# EAGLE board fermentasi (EAGLE 7.1.0)
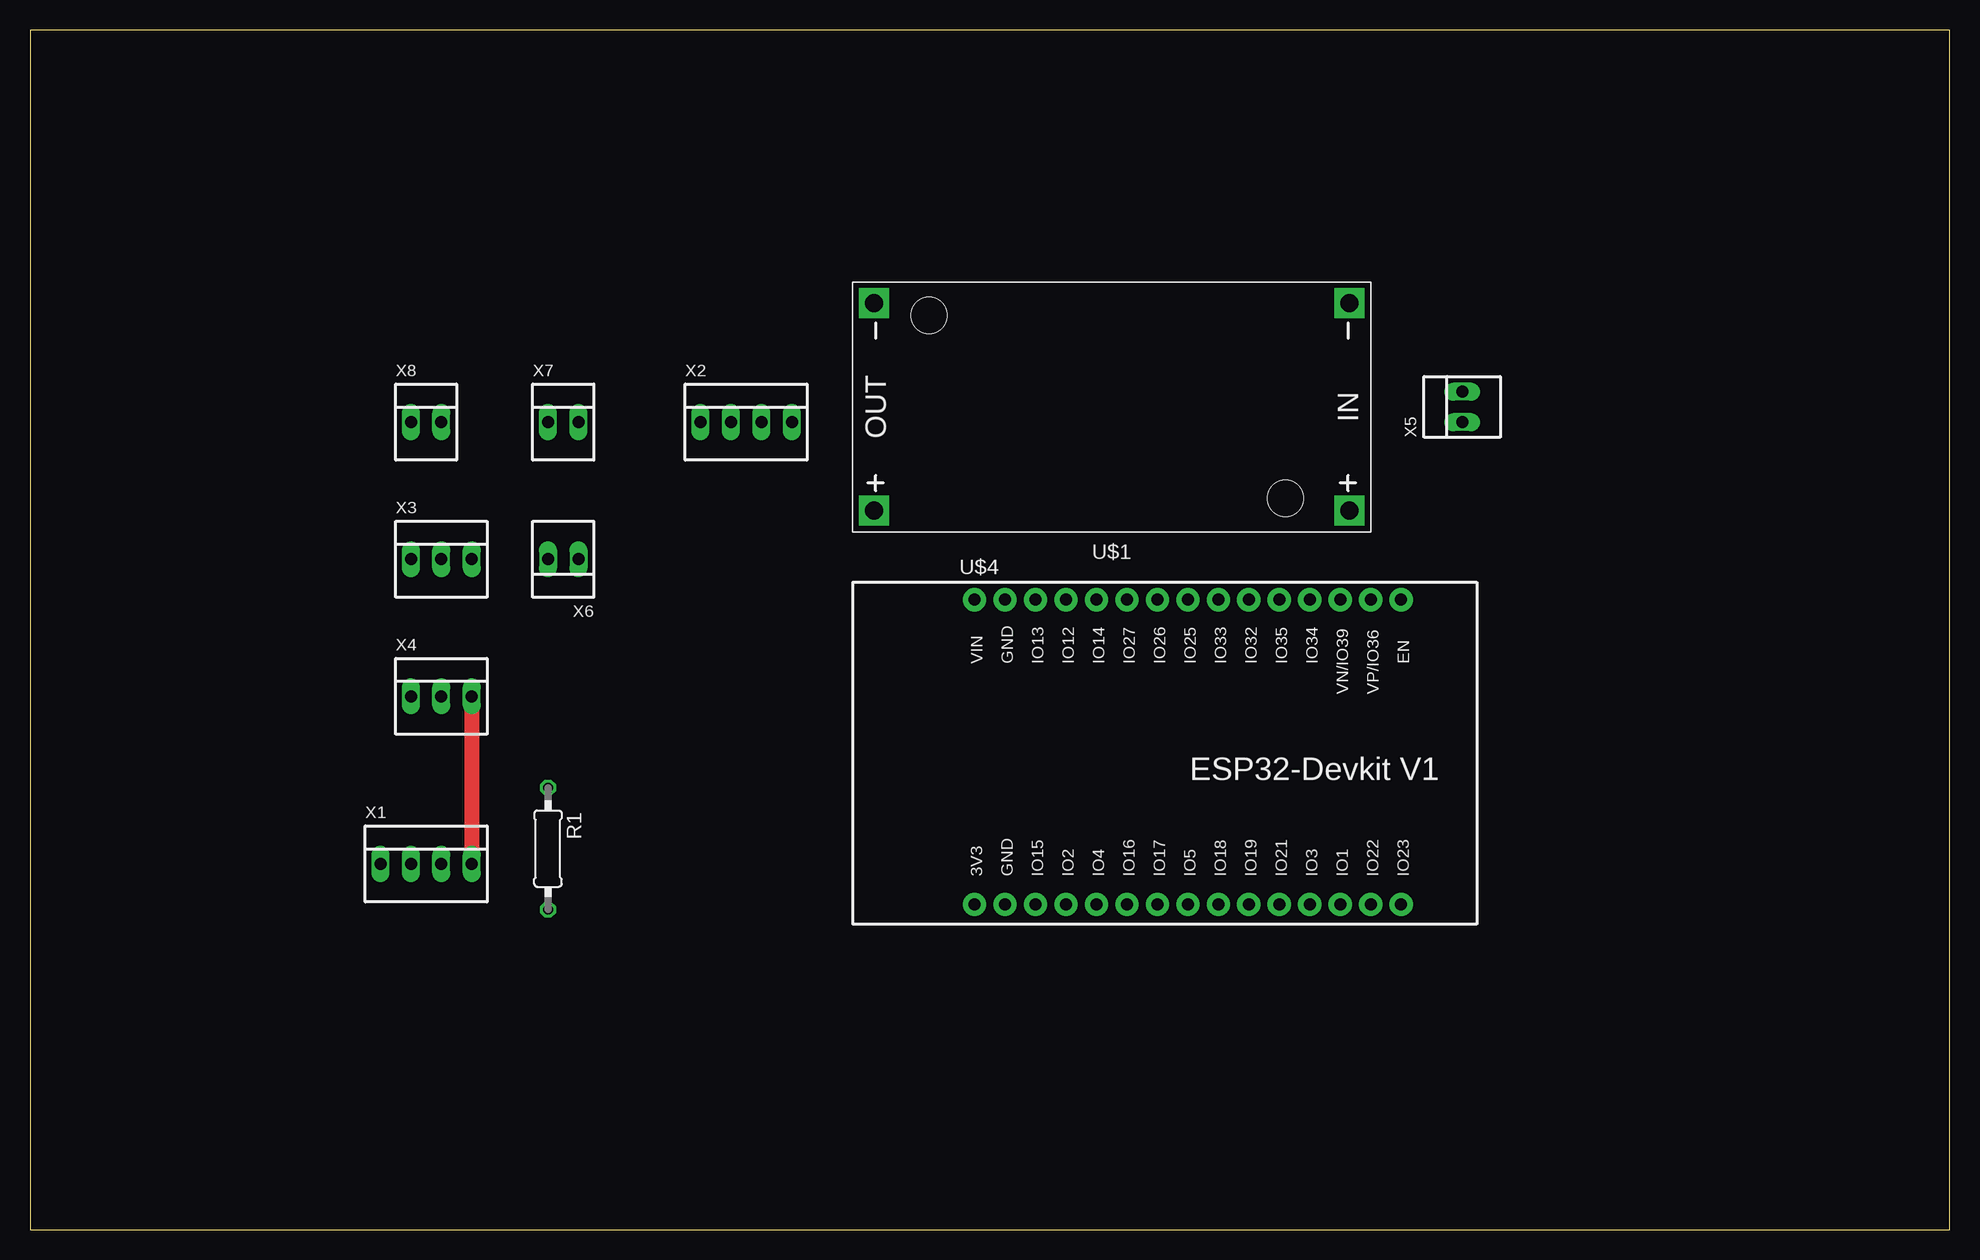
[diagram p0: board, top side]
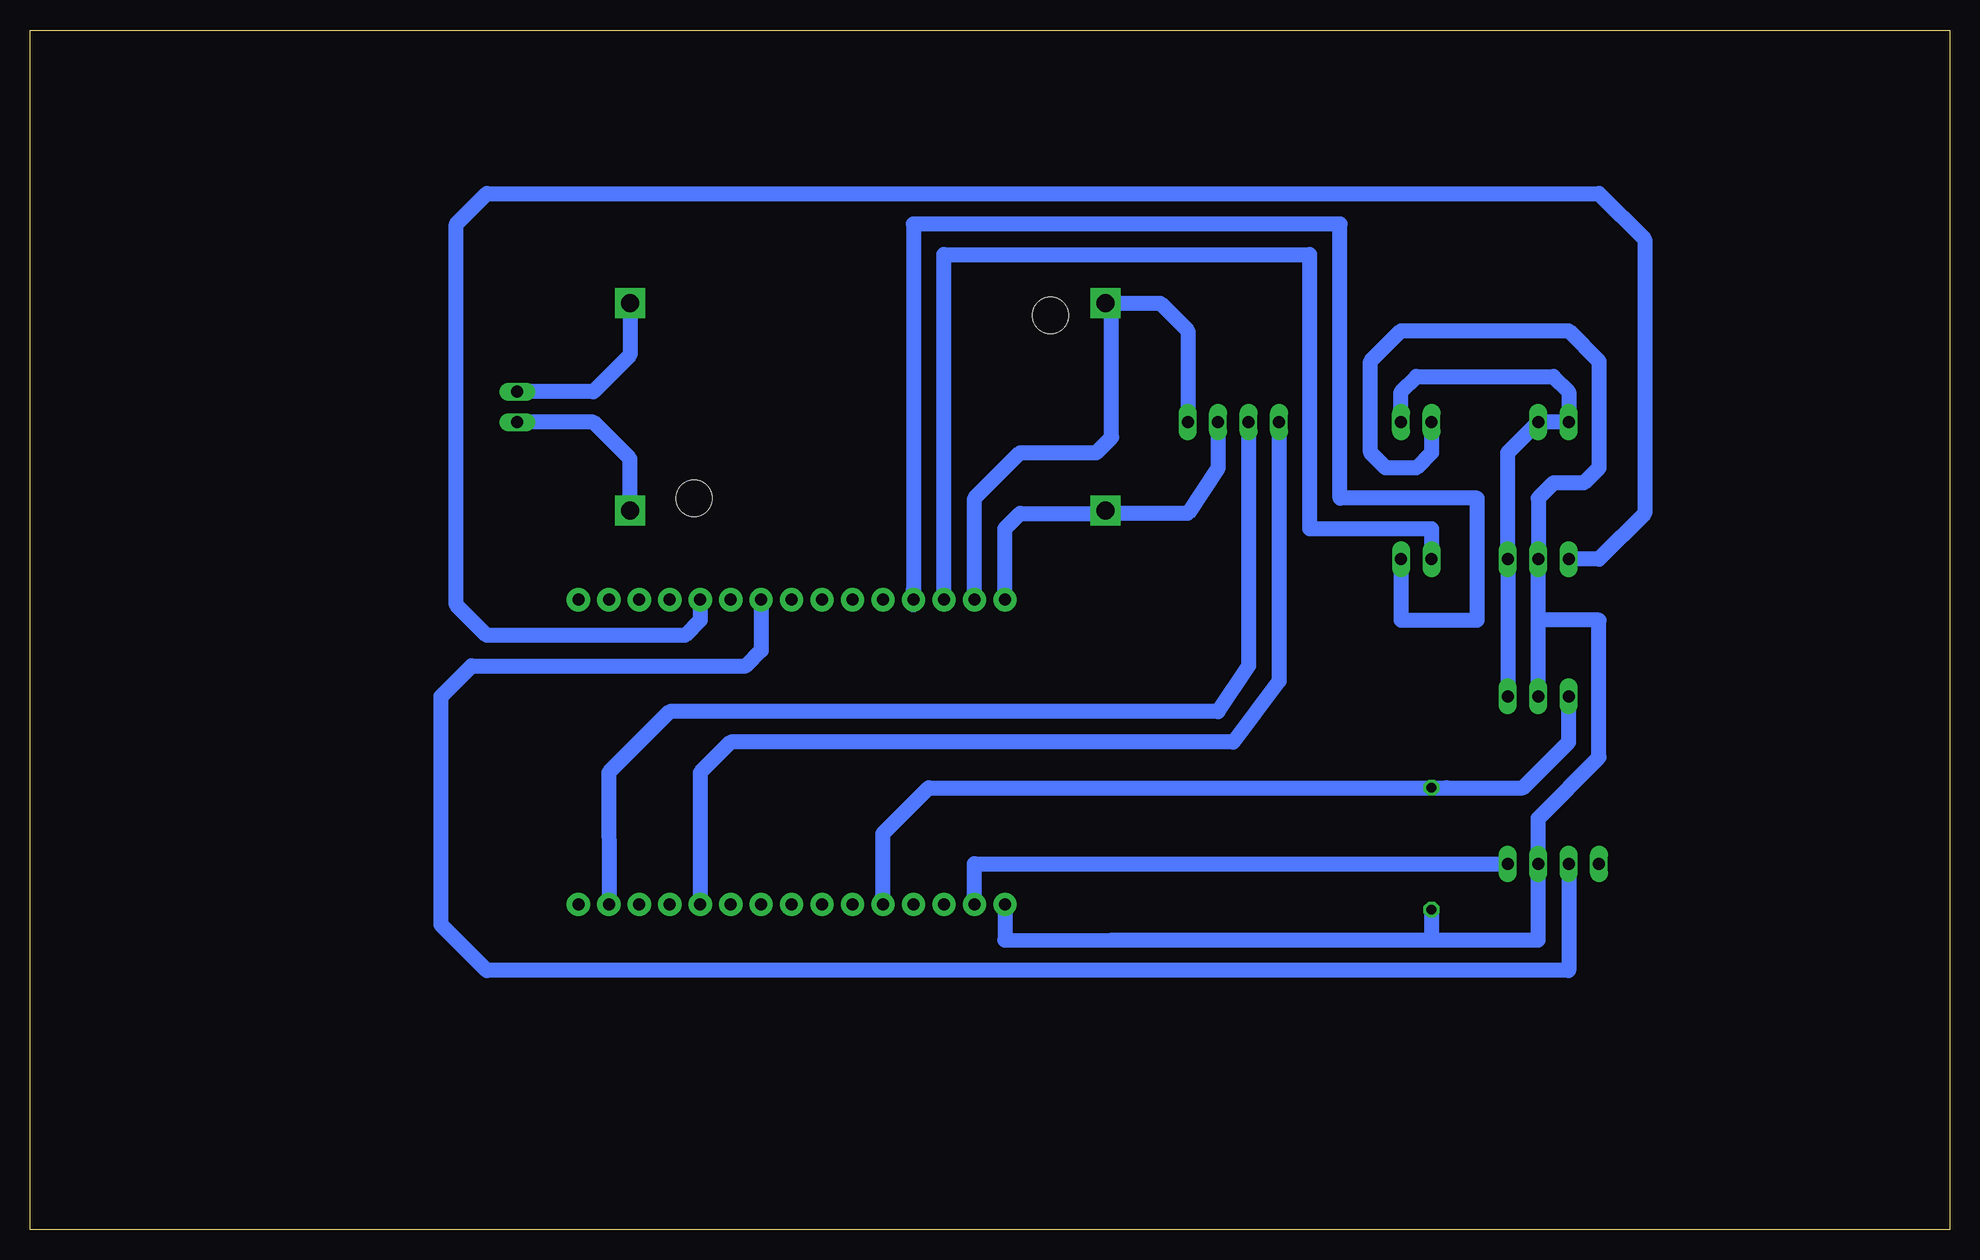
[diagram p1: board, bottom side, seen from below]

Size 160 x 100 mm. Coordinates in mm from the lower left corner, seen from the top.
Outline: 0,0 160,0 160,100 0,100 0,0
Copper layers (1*16): Top 0.035mm / dielectric 1.5mm / Bottom 0.035mm
Design rules "default": minimum track width 10mil, minimum drill 24mil, track to track 8mil, track to pad 8mil, pad to pad 8mil, via to via 8mil, smd to smd 8mil, copper to edge 40mil, drill to drill 8mil, minimum pad ring 10mil, minimum via ring 8mil, stop-mask expansion 4mil, vias tented up to drill 0mil, thermal gap 10mil

## Footprints (pad centres in the part's own frame; a part is rotated, then mirrored left to right if it is on the bottom)
0207/10 = drill 0.813 octagon: 1 -5.08,0; 2 5.08,0
DC-DC-STEP-DOWN-LM2596 = drill 1.5 pad 2.5 square: IN+ -19.812,8.636; IN- -19.812,-8.636; OUT+ 19.812,8.636; OUT- 19.812,-8.636 | hole 3: -14.478,7.62; 15.24,-7.62
ESP32-DEVKITV1 = drill 1 pad 1.93: 3V3 -16.52,-12.27; D1 13.96,-12.27; D2 -8.9,-12.27; D3 11.42,-12.27; D4 -6.36,-12.27; D5 1.26,-12.27; D12 -8.9,13.135; D13 -11.44,13.135; D14 -6.36,13.135; D15 -11.44,-12.27; D16 -3.82,-12.27; D17 -1.28,-12.27; D18 3.8,-12.27; D19 6.34,-12.27; D21 8.88,-12.27; D22 16.5,-12.27; D23 19.04,-12.27; D25 1.26,13.135; D26 -1.28,13.135; D27 -3.82,13.135; D32 6.34,13.135; D33 3.8,13.135; D34 11.42,13.135; D35 8.88,13.135; D36 16.5,13.135; D39 13.96,13.135; EN 19.04,13.135; GND@1 -13.98,13.135; GND@2 -13.98,-12.27; VIN -16.52,13.135
22-23-2041 = drill 1 long: 1 -3.81,0; 2 -1.27,0; 3 1.27,0; 4 3.81,0
22-23-2031 = drill 1 long: 1 -2.54,0; 2 0,0; 3 2.54,0
22-23-2021 = drill 1 long: 1 -1.27,0; 2 1.27,0

## Placement (x,y rotation side)
R1  [0207/10]  43.18,31.75 270 top
U$1  DC-DC-STEP-DOWN-LM2596  [DC-DC-STEP-DOWN-LM2596]  90.17,68.58 180 top
U$4  ESP32DEVKITV1  [ESP32-DEVKITV1]  95.25,39.37 0 top
X1  22-23-2041  [22-23-2041]  33.02,30.48 0 top
X2  22-23-2041  [22-23-2041]  59.69,67.31 0 top
X3  22-23-2031  [22-23-2031]  34.29,55.88 0 top
X4  22-23-2031  [22-23-2031]  34.29,44.45 0 top
X5  22-23-2021  [22-23-2021]  119.38,68.58 90 top
X6  22-23-2021  [22-23-2021]  44.45,55.88 180 top
X7  22-23-2021  [22-23-2021]  44.45,67.31 0 top
X8  22-23-2021  [22-23-2021]  33.02,67.31 0 top

## Library data of the parts
R1 = rcl
U$1 = diy-modules (2)
U$4 = ESP32-DEVKITV1
X1 X2 = con-molex; MF: MOLEX; MPN: 22-23-2041; OC_FARNELL: 1462920; OC_NEWARK: 38C0355
X3 X4 = con-molex; MF: MOLEX; MPN: 22-23-2031; OC_FARNELL: 1462950; OC_NEWARK: 30C0862
X5-X8 = con-molex; MF: MOLEX; MPN: 22-23-2021; OC_FARNELL: 1462926; OC_NEWARK: 25C3832

## Nets
3V: R1.2 U$4.3V3 X1.3 X3.2 X4.2 X7.1
7VIN: U$1.OUT+ U$4.VIN X2.3
12V: U$1.IN+ X5.1
DATA_DS: R1.1 U$4.D4 X4.1
DATA_PH: U$4.D35 X3.1
GND: U$1.IN- X5.2
GNDIN1: U$1.OUT- U$4.GND@1 X2.4
GNDIN2: U$4.GND@2 X1.4 X3.3 X4.3 X7.2 X8.1
IN1: U$4.D13 X6.2
IN2: U$4.D12 X6.1
LCD_SCL: U$4.D22 X2.2
LCD_SDA: U$4.D21 X2.1
MQ3: U$4.D33 X1.2

## Tracks (layer width: path | path; a pad name or v marks a point on that pad's centre or on a via)
3V
  Bottom 1.27: U$4.3V3 78.73,24.12 69.85,24.13 43.18,24.13 | 43.18,24.13 34.29,24.13 X1.3 34.29,34.29 29.21,39.37 29.21,50.8 34.29,50.8 | X7.1 43.18,64.77 44.45,63.5 46.99,63.5 48.26,64.77 48.26,72.39 45.72,74.93 31.75,74.93 29.21,72.39 29.21,63.5 30.48,62.23 33.02,62.23 34.29,60.96 X3.2 34.29,50.8 | X4.2 34.29,50.8 | R1.2 43.18,24.13
7VIN
  Bottom 1.27: U$4.VIN 78.73,58.43 77.47,59.69 70.61,59.69 U$1.OUT+ 70.1,59.69 63.5,59.69 60.96,63.5 X2.3
12V
  Bottom 1.27: U$1.IN+ 109.98,64.26 113.03,67.31 X5.1
DATA_DS
  Bottom 1.27: U$4.D4 88.9,33.02 85.09,36.83 R1.1 41.91,36.83 35.56,36.83 31.75,40.64 X4.1
DATA_PH
  Bottom 1.27: U$4.D35 104.13,50.81 105.41,49.53 121.92,49.53 124.46,52.07 124.46,83.82 121.92,86.36 29.21,86.36 25.4,82.55 25.4,59.69 29.21,55.88 X3.1
GND
  Bottom 1.27: U$1.IN- 109.98,72.9 113.03,69.85 X5.2
GNDIN1
  Bottom 1.27: X2.4 63.5,74.93 65.79,77.22 U$1.OUT- 69.85,76.71 69.85,66.04 71.12,64.77 77.47,64.77 81.27,60.97 U$4.GND@1
GNDIN2
  Top 1.27: X4.3 X1.4
  Bottom 1.27: X7.2 45.72,69.85 44.45,71.12 33.02,71.12 31.75,69.85 X8.1 34.29,67.31 36.83,64.77 X3.3 X4.3 | U$4.GND@2 81.27,30.49 81.28,30.48 X1.4
IN1
  Bottom 1.27: U$4.D13 83.82,81.28 53.34,81.28 53.34,58.42 43.18,58.42 X6.2
IN2
  Bottom 1.27: X6.1 45.72,50.8 39.37,50.8 39.37,60.96 50.8,60.96 50.8,83.82 86.36,83.82 86.36,53.34 | 86.36,52.07 86.36,53.34 | 86.36,53.34 U$4.D12
LCD_SCL
  Bottom 1.27: X2.2 58.42,46.99 60.96,43.18 106.68,43.18 111.76,38.1 U$4.D22
LCD_SDA
  Bottom 1.27: X2.1 55.88,45.72 59.69,40.64 101.6,40.64 104.14,38.1 U$4.D21
MQ3
  Bottom 1.27: X1.2 31.75,21.59 121.92,21.59 125.73,25.4 125.73,44.45 123.19,46.99 100.33,46.99 99.06,48.26 U$4.D33